# EAGLE board probe_v3-regularpad (EAGLE 9.3.2)
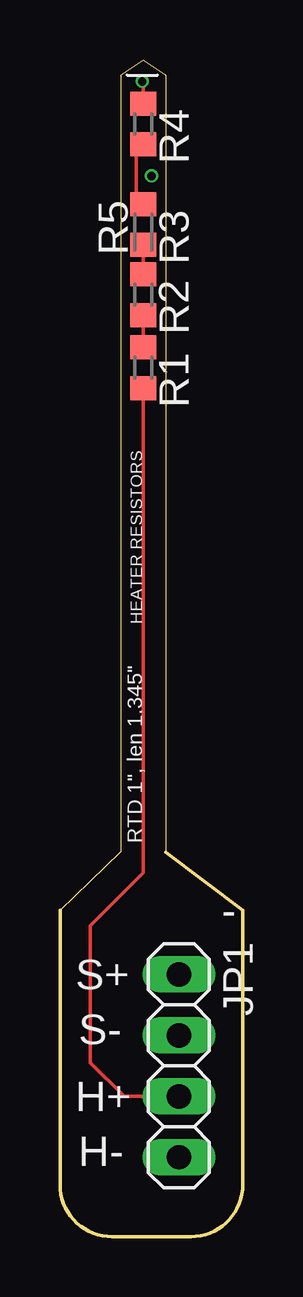
[diagram p0: board, top side]
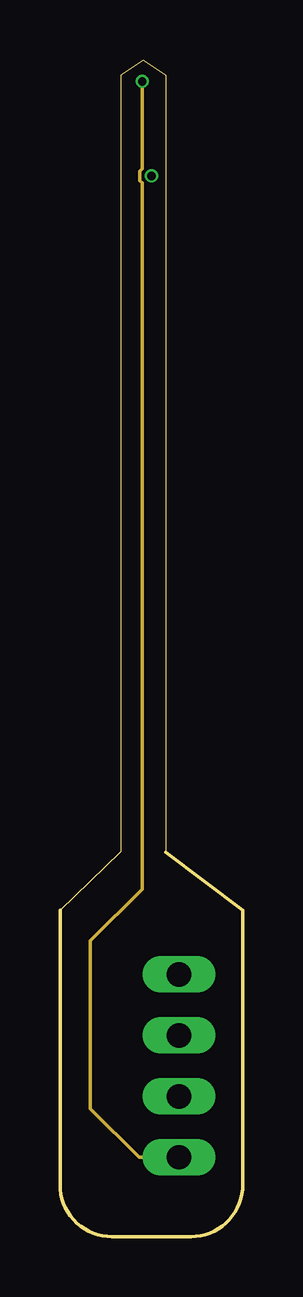
[diagram p1: board, inner layer Route2]
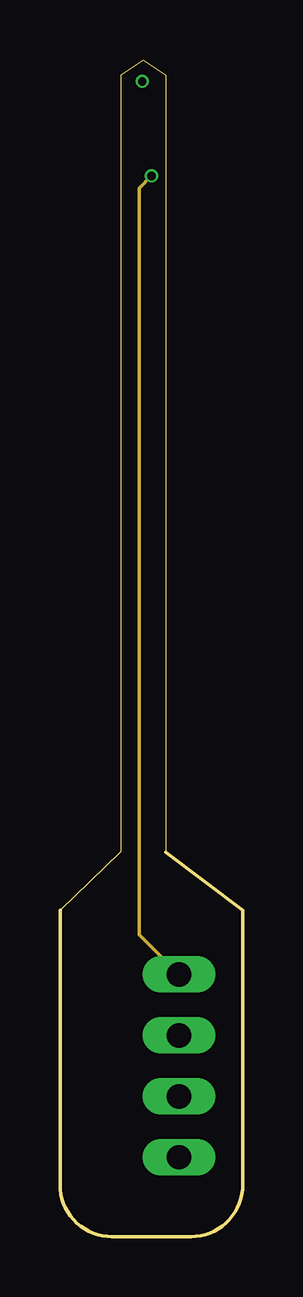
[diagram p2: board, inner layer Route3]
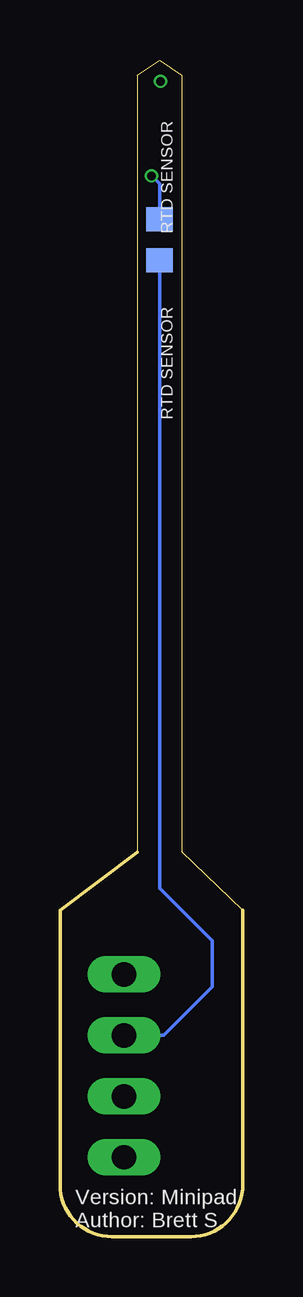
[diagram p3: board, bottom side, seen from below]

Size 7.62 x 49.02 mm. Coordinates in mm from the lower left corner, seen from the top.
Outline: 0,13.59 0,2.16 arc90 2.16,0 2.67,0 4.32,0 5.46,0 arc90 7.62,2.16 7.62,13.59 4.41,16 4.41,48.39 3.47,49.02 2.54,48.39 2.54,16.04 0,13.59
Outline: 0,13.34 0,13.59
Copper layers (1*2*3*16): Top 0.035559375mm / dielectric 0.17018125mm / Route2 0.01778125mm / dielectric 47mil / Route3 0.01778125mm / dielectric 0.17018125mm / Bottom 0.035559375mm
Design rules "oshpark-4layer *": minimum track width 5mil, minimum drill 10mil, track to track 5mil, track to pad 5mil, pad to pad 5mil, via to via 5mil, smd to smd 5mil, copper to edge 15mil, drill to drill 6mil, minimum pad ring 4mil, minimum via ring 4mil, stop-mask expansion 2.5mil, vias tented up to drill 0mil, thermal gap 10mil

## Footprints (pad centres in the part's own frame; a part is rotated, then mirrored left to right if it is on the bottom)
1X04 = drill 1.016 long: 1 -3.81,0; 2 -1.27,0; 3 1.27,0; 4 3.81,0
R0603 = smd 1 x 1.1: 1 -0.85,0; 2 0.85,0
R0603' = smd 1 x 1.1 bottom: 1 -0.85,0; 2 0.85,0

## Placement (x,y rotation side)
JP1  [1X04]  4.95,7.11 270 top
R1  [R0603]  3.47,36.2 270 top
R2  [R0603]  3.47,39.24 270 top
R3  [R0603]  3.47,42.16 270 top
R4  [R0603]  3.47,46.36 270 top
R5  [R0603']  3.47,41.53 90 top

## Library data of the parts
JP1 = pinhead
R1-R4 = rcl; SPICEPREFIX: R
R5 = rcl-bottom; SPICEPREFIX: R

## Nets
BAT: JP1.3 R1.2
DAT: JP1.2 R5.1
GND: JP1.4 R4.1
N$1: R1.1 R2.2
N$2: R2.1 R3.2
N$3: R3.1 R4.2
V+: JP1.1 R5.2

## Tracks (layer width: path | path; a pad name or v marks a point on that pad's centre or on a via)
BAT
  Top 0.152: R1.2 3.47,15.15 1.27,12.95 1.27,7.24 2.67,5.84 JP1.3
DAT
  Bottom 0.152: R5.1 3.47,14.52 1.27,12.32 1.27,10.41 3.3,8.38 JP1.2
GND  (via drill 0.35)
  Top 0.152: R4.1 3.47,48.09 v3.43,48.13
  Route2 0.152: v3.43,48.13 3.43,44.49 3.33,44.39 3.33,44 3.43,43.9 3.43,14.48 1.27,12.32 1.27,5.33 3.3,3.3 JP1.4
N$1
  Top 0.152: R1.1 R2.2
N$2
  Top 0.152: R3.2 R2.1
N$3
  Top 0.152: R3.1 3.17,43.18 3.17,45.21 R4.2
V+  (via drill 0.35)
  Route3 0.152: JP1.1 3.3,12.57 3.3,43.69 v3.81,44.2
  Bottom 0.152: R5.2 3.47,43.86 v3.81,44.2

## Text on the board
tNames: HEATER RESISTORS | RTD 1", len 1.345" | - | S+ | S- | H+ | H-
bNames: RTD SENSOR | RTD SENSOR | Version: Minipad / Author: Brett S.
Document: 1. Short R_BIAS1 if using RTD thermistor. / It enables to use 2-wire PT100. / V+:Positive, DAT&V-: negative | 2. Short not using heat_resistor pads